# EAGLE board resourciboard - routed (EAGLE 9.6.2)
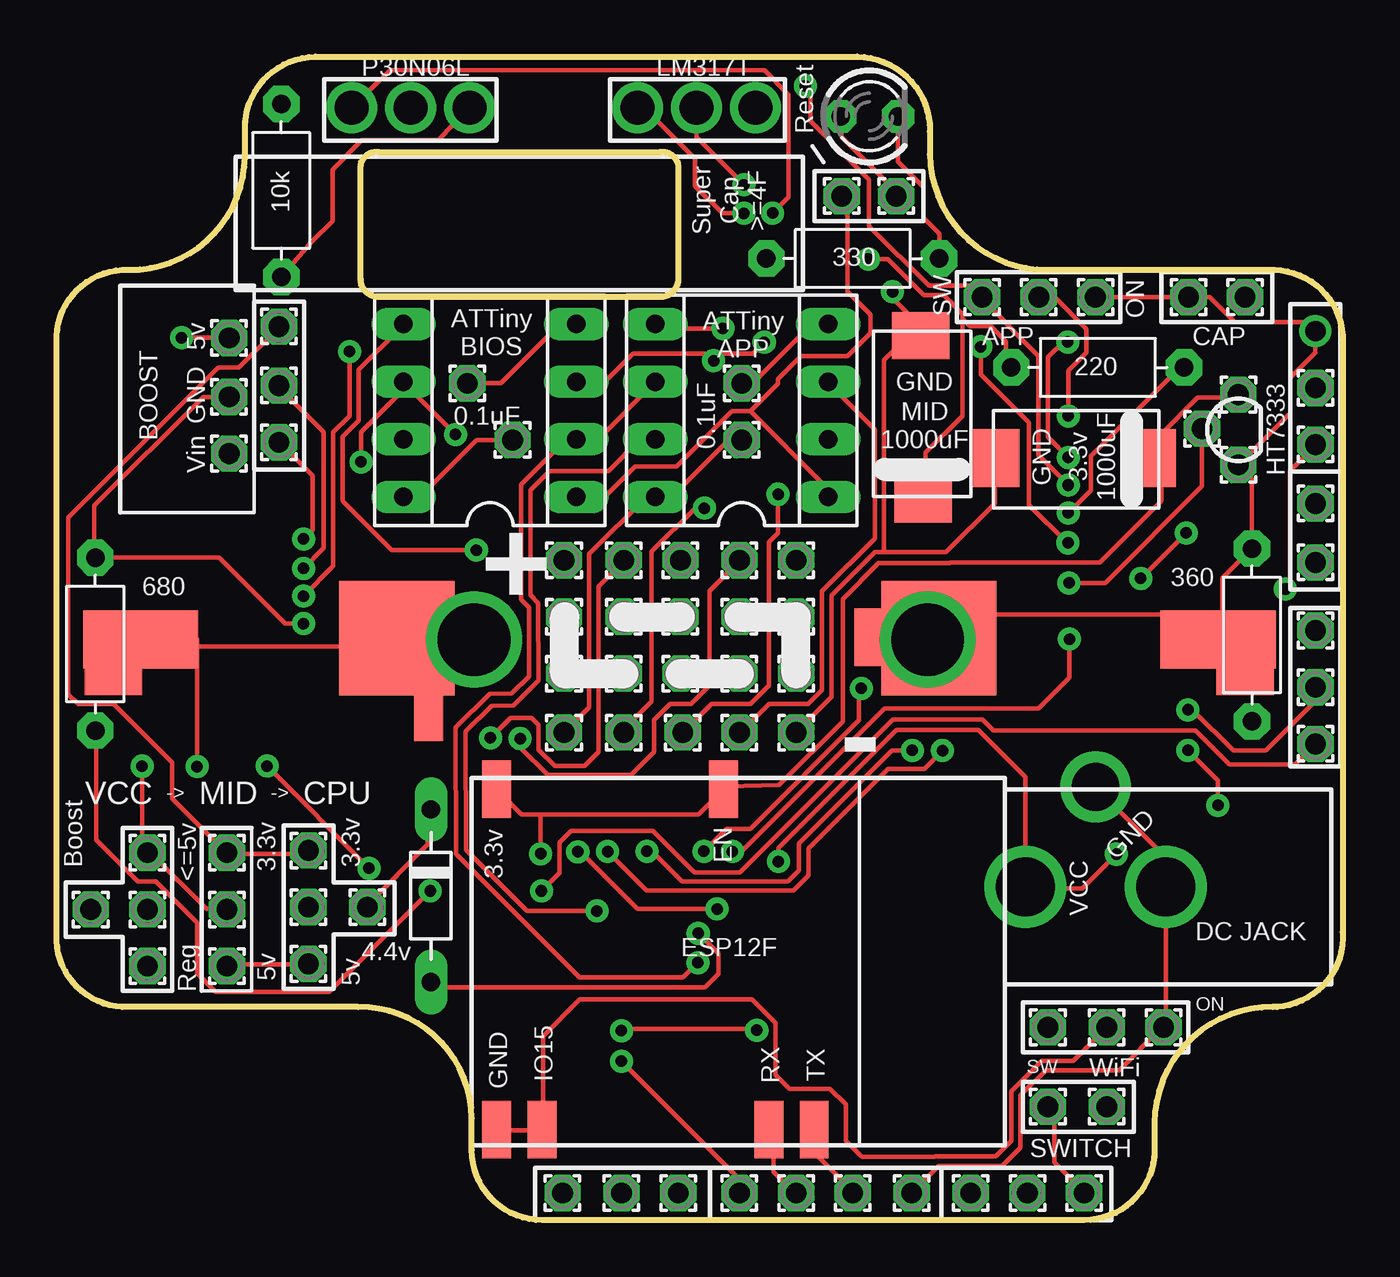
[diagram p0: board, top side]
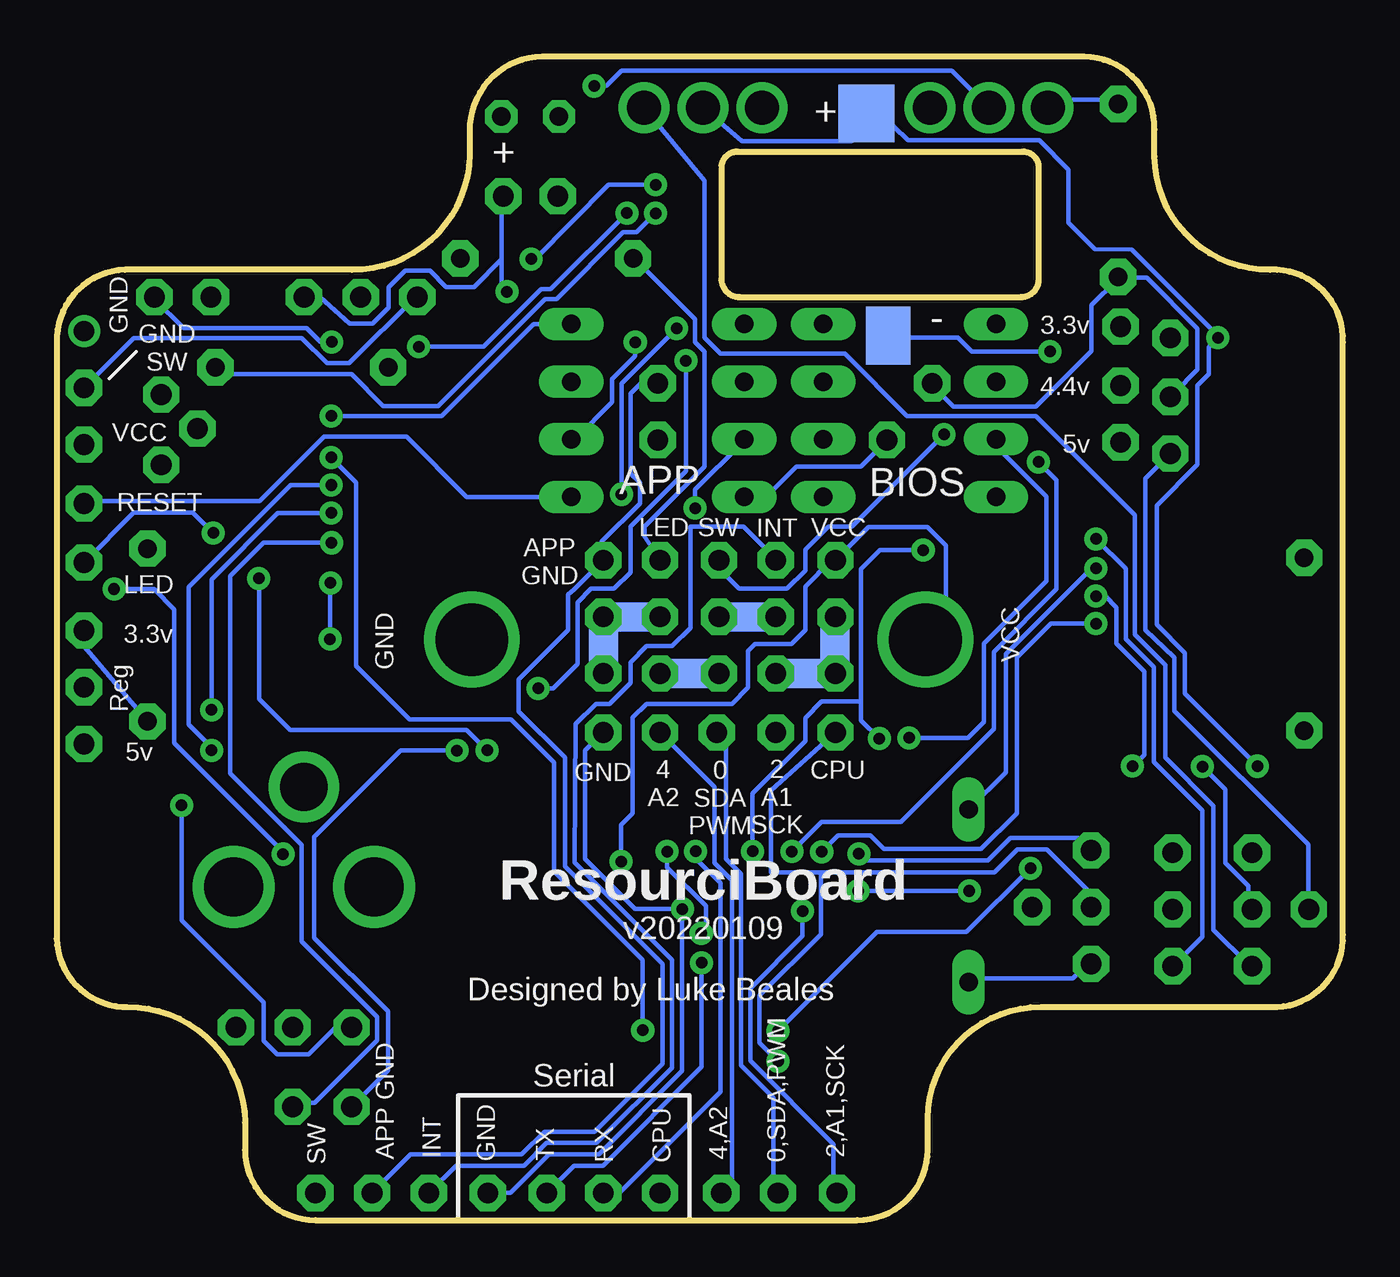
[diagram p1: board, bottom side, seen from below]

Size 56.71 x 51.3 mm. Coordinates in mm from the lower left corner, seen from the top.
Outline: 0,38.7 arc-90 2.9,41.9 3.2,41.9 arc90 8.3,46.9 8.3,48.1 arc-90 11.4,51.3 35.3,51.3 arc-90 38.5,48 38.5,47 arc90 43.7,41.9 53.7,41.9 arc-90 56.7,38.7 56.7,12.7 arc-90 53.8,9.4 53.6,9.4 arc90 48.4,4.3 48.4,3.1 arc-90 45.3,0 21.4,0 arc-90 18.3,3.1 18.3,4.5 arc90 13.3,9.4 2.9,9.4 arc-90 0,12.6 0,38.7
Outline: 13.4,46.5 arc-90 14.2,47.1 26.6,47.1 arc-90 27.4,46.5 27.4,41.5 arc-90 26.6,40.7 14.2,40.7 arc-90 13.4,41.5 13.4,46.5
Copper layers (1*16): Top 0.035mm / dielectric 1.5mm / Bottom 0.035mm
Design rules "SparkFun": minimum track width 8mil, minimum drill 20mil, track to track 8mil, track to pad 8mil, pad to pad 8mil, via to via 8mil, smd to smd 8mil, copper to edge 10mil, drill to drill 8mil, minimum pad ring 12mil, minimum via ring 10mil, stop-mask expansion 4mil, vias tented up to drill 25mil, thermal gap 10mil
vRestrict: area 17.4,2.6 to 35.9,20.6; area 21.2,20.6 to 33.9,30.3

## Footprints (pad centres in the part's own frame; a part is rotated, then mirrored left to right if it is on the bottom)
1,6/0,9 = drill 0.914 pad 1.6 octagon: 1 0,0
LED3MM = drill 0.813 octagon: A -1.27,0; K 1.27,0
SOCKET-08 = drill 0.813 long: 1 -3.81,-3.81; 2 -1.27,-3.81; 3 1.27,-3.81; 4 3.81,-3.81; 5 3.81,3.81; 6 1.27,3.81; 7 -1.27,3.81; 8 -3.81,3.81
R-7,5 = drill 0.813 pad 1.6 octagon: 1 -3.81,0; 2 3.81,0
SMD1,27-2,54 = smd 1.27 x 2.54: 1 0,0
SMD2,54-5,08 = smd 2.54 x 5.08: 1 0,0
D-7.5 = drill 0.813 long: A 3.81,0; C -3.81,0

## Placement (x,y rotation side)
3.3V  [1,6/0,9]  11.1,16.3 0 top  (not fitted)
5V  [1,6/0,9]  7.5,11.2 180 top  (not fitted)
E$1  [LED3MM]  35.83,48.67 0 top
E$2  [SOCKET-08]  30.2,35.7 90 top
E$3  [1,6/0,9]  55.5,26 0 top  (not fitted)
E$4  [R-7,5]  9.9,45.4 90 top
E$5  [SMD1,27-2,54]  38.1,39.4 270 top
E$6  [R-7,5]  35.1,42.4 0 top
E$7  [R-7,5]  45.9,37.6 0 top
E$8  [SOCKET-08]  19.1,35.7 90 top
E$9  [1,6/0,9]  20.1,34.4 180 top  (not fitted)
E$10  [R-7,5]  1.7,25.4 90 top
E$11  [1,6/0,9]  30.1,29.1 90 top  (not fitted)
E$12  [1,6/0,9]  27.5,29.1 90 top  (not fitted)
E$13  [SMD1,27-2,54]  20.4,48.8 180 bottom
E$14  [SMD1,27-2,54]  33.4,4 180 top
E$15  [SMD1,27-2,54]  29.4,19 180 top
E$16  [R-7,5]  52.7,25.8 90 top
E$17  [SMD1,27-2,54]  19.4,19 180 top
E$18  [1,6/0,9]  27.4,1.2 90 top  (not fitted)
E$19  [SMD1,27-2,54]  41,33.6 0 top
E$20  [SMD1,27-2,54]  31.4,4 180 top
E$21  [1,6/0,9]  25,29.1 90 top  (not fitted)
E$22  [SMD2,54-5,08]  3.7,25.6 90 top
E$23  [1,6/0,9]  18.1,36.9 180 top  (not fitted)
E$24  [1,6/0,9]  55.5,34.2 180 top  (not fitted)
E$25  [SMD2,54-5,08]  51.2,25.6 90 top
E$26  [SMD2,54-5,08]  38.9,26.9 90 top
E$27  VCC  [SMD2,54-5,08]  15,26.9 90 top
E$28  [1,6/0,9]  22.3,1.2 90 top  (not fitted)
E$29  [1,6/0,9]  24.9,1.2 90 top  (not fitted)
E$30  [1,6/0,9]  55.5,31.6 180 top  (not fitted)
E$31  [1,6/0,9]  45.3,1.2 90 top  (not fitted)
E$32  [1,6/0,9]  40.3,1.2 90 top  (not fitted)
E$33  [1,6/0,9]  55.5,29 180 top  (not fitted)
E$34  [1,6/0,9]  49.9,40.7 270 top  (not fitted)
E$35  [1,6/0,9]  52.4,40.7 270 top  (not fitted)
E$36  [1,6/0,9]  11.1,11.3 0 top  (not fitted)
E$37  [1,6/0,9]  30.1,1.2 0 top  (not fitted)
E$38  [SMD1,27-2,54]  20.4,39 180 bottom
E$39  [SMD2,54-5,08]  38.9,24.4 90 top
E$40  VCC  [SMD2,54-5,08]  15,24.4 90 top
E$41  [1,6/0,9]  43.3,40.7 90 top  (not fitted)
E$42  [1,6/0,9]  40.8,40.7 90 top  (not fitted)
E$43  [1,6/0,9]  45.8,40.7 90 top  (not fitted)
E$44  [SMD1,27-2,54]  19.4,4 180 top
E$45  [1,6/0,9]  11.1,13.8 0 top  (not fitted)
E$46  [D-7.5]  16.5,14.3 270 top
E$47  [1,6/0,9]  13.7,13.8 90 top  (not fitted)
E$48  [1,6/0,9]  4,16.2 180 top  (not fitted)
E$49  [1,6/0,9]  4,13.7 180 top  (not fitted)
E$50  [1,6/0,9]  43.7,8.5 270 top  (not fitted)
E$51  [1,6/0,9]  46.3,8.5 270 top  (not fitted)
E$52  [1,6/0,9]  52.1,33.3 180 top  (not fitted)
E$53  [1,6/0,9]  50.5,34.9 180 top  (not fitted)
E$54  [1,6/0,9]  52.1,36.4 180 top  (not fitted)
E$55  [1,6/0,9]  43.7,5 90 top  (not fitted)
E$56  [1,6/0,9]  46.3,5 90 top  (not fitted)
E$57  [1,6/0,9]  4,11.2 180 top  (not fitted)
E$58  [1,6/0,9]  1.5,13.7 270 top  (not fitted)
E$59  [1,6/0,9]  34.62,45.15 90 top  (not fitted)
E$60  [1,6/0,9]  7.5,16.2 180 top  (not fitted)
E$61  [1,6/0,9]  37.02,45.15 90 top  (not fitted)
E$62  [1,6/0,9]  30.2,34.4 180 top  (not fitted)
E$63  [1,6/0,9]  30.2,36.9 180 top  (not fitted)
E$64  [SMD1,27-2,54]  22.39,25.41 180 bottom
E$65  [SMD1,27-2,54]  32.6,25.4 180 bottom
E$66  [1,6/0,9]  55.5,36.7 180 top  (not fitted)
E$67  [SMD1,27-2,54]  26.2,26.6 270 bottom
E$68  [SMD1,27-2,54]  28.7,24.1 90 bottom
E$69  [SMD1,27-2,54]  31.3,26.6 90 bottom
E$70  [SMD1,27-2,54]  21.4,4 180 top
E$71  [1,6/0,9]  30.1,26.6 90 top  (not fitted)
E$72  [1,6/0,9]  22.37,29.1 90 top  (not fitted)
E$73  [SMD1,27-2,54]  41.8,33.6 0 top
E$74  [1,6/0,9]  27.5,24.1 90 top  (not fitted)
E$75  [1,6/0,9]  9.8,36.8 0 top  (not fitted)
E$76  [1,6/0,9]  27.5,26.6 90 top  (not fitted)
E$77  [1,6/0,9]  37.7,1.2 90 top  (not fitted)
E$78  [1,6/0,9]  35.1,1.2 90 top  (not fitted)
E$79  [1,6/0,9]  32.6,1.2 90 top  (not fitted)
E$80  [1,6/0,9]  25,24.1 90 top  (not fitted)
E$81  [1,6/0,9]  7.6,36.3 180 top  (not fitted)
E$82  [1,6/0,9]  7.6,38.9 180 top  (not fitted)
E$83  [1,6/0,9]  7.6,33.8 180 top  (not fitted)
E$84  [1,6/0,9]  55.5,23.5 0 top  (not fitted)
E$85  [1,6/0,9]  22.37,21.5 180 top  (not fitted)
E$86  [1,6/0,9]  55.5,21 0 top  (not fitted)
E$87  [1,6/0,9]  25,26.6 90 top  (not fitted)
E$88  [1,6/0,9]  9.8,34.3 0 top  (not fitted)
E$89  [1,6/0,9]  22.37,26.6 90 top  (not fitted)
E$90  [1,6/0,9]  22.37,24.1 90 top  (not fitted)
E$91  [1,6/0,9]  32.6,24.1 90 top  (not fitted)
E$92  [1,6/0,9]  32.6,21.5 90 top  (not fitted)
E$93  [1,6/0,9]  32.6,26.6 90 top  (not fitted)
E$94  [1,6/0,9]  30.1,24.1 90 top  (not fitted)
E$95  [SMD1,27-2,54]  38.1,38.6 270 top
E$96  [1,6/0,9]  42.8,1.2 270 top  (not fitted)
E$97  [SMD1,27-2,54]  23.8,24.1 270 bottom
E$98  [1,6/0,9]  48.8,8.5 270 top  (not fitted)
E$99  [1,6/0,9]  9.8,39.4 0 top  (not fitted)
E$100  [SMD1,27-2,54]  21.6,48.8 180 bottom
E$101  [SMD1,27-2,54]  19.7,39 180 bottom
E$102  [SMD1,27-2,54]  52.4,23.8 90 top
E$103  [1,6/0,9]  27.6,21.5 90 top  (not fitted)
E$104  [1,6/0,9]  25,21.5 90 top  (not fitted)
E$105  [1,6/0,9]  30.1,21.5 90 top  (not fitted)
E$107  [1,6/0,9]  32.6,29.1 0 top  (not fitted)
E$108  [SMD1,27-2,54]  35.8,25.7 0 top
E$109  [SMD1,27-2,54]  16.4,22.4 0 top
POWERONE  [1,6/0,9]  7.5,13.7 180 top  (not fitted)
VCC  [SMD1,27-2,54]  48.7,33.6 0 top
VCC1  [SMD1,27-2,54]  38.2,31.4 270 top
VCC2  [SMD1,27-2,54]  48,33.6 0 top
VCC3  [SMD1,27-2,54]  38.2,32.3 270 top
VCC4  [SMD1,27-2,54]  2.5,23.8 270 top

## Library data of the parts
3.3V 5V E$3 E$5 E$9 E$11-E$15 E$17-E$45 E$47-E$105 E$107-E$109 POWERONE VCC VCC1-VCC4 = wirepad
E$1 = led
E$2 E$8 = ic-package
E$4 E$6 E$7 E$10 E$16 = discrete
E$46 = diode

## Nets
0: E$2.5 E$29.1 E$103.1
2/A1: E$2.7 E$28.1 E$104.1
3.3V: 3.3V.1 E$15.1 E$17.1 E$54.1 E$60.1 E$99.1 VCC2.1 VCC.1
4.4V: E$46.C E$47.1 E$75.1
4/A2: E$2.3 E$18.1 E$105.1
5V: 5V.1 E$36.1 E$46.A E$53.1 E$88.1
BIOS_LED: E$6.1 E$8.5 E$11.1 E$33.1
BIOS_SW: E$4.2 E$56.1
CAP_GND: E$35.1 E$38.1 E$101.1
CPU: E$2.8 E$8.8 E$9.1 E$37.1 E$45.1 E$62.1 E$85.1
GND: E$1.A E$4.1 E$5.1 E$8.4 E$10.2 E$16.2 E$19.1 E$23.1 E$25.1 E$26.1 E$34.1 E$39.1 E$43.1 E$52.1 E$61.1 E$73.1 E$77.1 E$81.1 E$92.1 E$95.1 E$98.1 E$108.1
GND_APP: E$2.4 E$41.1 E$63.1 E$96.1 E$107.1
GND_WIFI: E$44.1 E$51.1 E$70.1
INT: E$8.7 E$21.1 E$32.1
LED_+: E$1.K E$6.2
MID: E$7.1 E$13.1 E$48.1 E$82.1 E$100.1 POWERONE.1 VCC1.1 VCC3.1
PRE_BIOS_SW: E$8.6 E$12.1 E$31.1 E$55.1
REG_GND: E$7.2 E$84.1
REG_GND_3V: E$3.1 E$16.1
REG_GND_5V: E$10.1 E$86.1
RESET: E$2.1 E$8.1 E$30.1 E$59.1
RX: E$2.2 E$8.3 E$20.1 E$79.1
SW: E$42.1 E$50.1 E$66.1
TX: E$2.6 E$8.2 E$14.1 E$78.1
VCC: E$22.1 E$24.1 E$27.1 E$40.1 E$49.1 E$72.1 E$109.1
VCC_TO_BOOST: E$58.1 E$83.1
VCC_TO_REG: E$57.1

## Tracks (layer width: path | path; a pad name or v marks a point on that pad's centre or on a via)
0  (via drill 0.51)
  Top 0.203: v29.37,39.32 26.52,39.32 E$2.5 | v31.81,32.01 31.81,30.31 31.41,29.91 31.41,23.57 30.6,22.76 28.87,22.76 27.61,21.5 E$103.1
  Bottom 0.203: v29.37,39.32 31.81,36.88 v31.81,32.01 | E$29.1 25.1,1.44 25.1,5.39 26.53,6.82 26.53,15.27 27.2,15.94 27.2,21.1 E$103.1
2/A1  (via drill 0.51)
  Top 0.203: v28.55,31.4 28.15,31.4 26.23,29.47 26.23,22.86 25,21.63 E$104.1 | v23.82,13.63 20.74,13.63 18.04,16.32 18.03,21.55 19.17,22.68 20.15,22.7 21.25,23.8 21.23,27.21 20.89,27.55 20.89,32.2 21.72,33.03 24.32,33.03 25.72,34.43 E$2.7
  Bottom 0.203: v28.55,31.4 28.55,32.21 26.52,34.24 E$2.7 | v23.82,13.63 23.82,12.53 26.12,10.23 26.12,7.02 22.46,3.35 22.46,1.53 E$28.1
3.3V  (via drill 0.51)
  Top 0.203: VCC.1 48.7,31.7 46,29 39.4,29 39.38,28.97 36.23,28.97 34.66,27.4 34.66,21.99 31.85,19.19 29.53,19.13 E$15.1 28.3,17.9 21.34,17.9 | 21.34,17.9 20.5,17.9 E$17.1 | 3.3V.1 11.08,16.16 7.63,16.16 E$60.1 5.1,18.6 5.1,20.18 2.52,22.76 0.94,22.76 0.51,23.19 0.51,30.99 7.12,37.59 8.03,37.59 9.8,39.36 E$99.1 | VCC.1 48.67,33.61 48.67,34.65 50.3,36.27 51.92,36.27 E$54.1 | 21.34,17.9 v21.34,16.16 | VCC2.1 48.07,33.63 48.57,33.63 VCC.1
  Bottom 0.203: 3.3V.1 11.66,16.86 14.65,16.86 15.65,15.85 21.04,15.85 v21.34,16.16
4.4V  (via drill 0.51)
  Top 0.203: E$46.C 16.36,17.98 16.36,16.56 13.72,13.92 E$47.1 | v10.88,28.74 11.78,29.64 11.78,34.75 9.86,36.67 9.86,36.68 E$75.1
  Bottom 0.203: v10.88,28.74 10.98,28.84 14.86,24.95 14.86,19.75 E$46.C
4/A2
  Top 0.203: E$2.3 34.04,36.88 36.07,34.85 36.07,30.06 33.75,27.74 33.75,23.38 33.13,22.76 31.41,22.76 30.19,21.55 E$105.1
  Bottom 0.203: E$18.1 26.94,1.66 26.94,14.99 27.7,15.75 27.7,19.1 E$105.1
5V  (via drill 0.51)
  Top 0.203: 5V.1 7.63,11.28 11.08,11.28 E$36.1 | E$53.1 50.5,32.36 46.24,28.1 v44.64,28.1 | v29.79,16.26 30.19,16.26 36.49,22.56 43.29,22.56 44.66,23.92 v44.66,25.62 | v28.29,12.65 29.18,11.76 29.18,10.86 28.59,10.27 16.72,10.27 E$46.A | v10.88,30.04 11.28,30.44 11.28,32.82 E$88.1
  Bottom 0.203: E$46.A 16.36,10.67 11.89,10.67 11.28,11.28 E$36.1 | 5V.1 6.2,12.5 6.2,18.07 8.33,20.2 8.33,24.39 9.57,25.63 9.57,28.73 v10.88,30.04 | v44.64,28.1 44.66,28.08 v44.66,25.62 | v28.29,12.65 28.09,12.85 28.09,13.85 29.79,15.56 v29.79,16.26
BIOS_LED  (via drill 0.51)
  Top 0.203: v18.5,29.54 v18.49,29.55 14.76,29.55 12.61,31.71 12.61,34.55 13.31,35.26 13.31,37.49 15.14,39.32 E$8.5 | v20.44,21.24 20.44,20.84 21.66,19.62 25.31,19.62 26.33,20.64 26.33,22.05 27.05,22.77 27.96,22.77 28.77,23.58 28.77,27.75 30.09,29.06 E$11.1 | v37.72,20.72 36.82,20.72 32.72,16.62 32.72,15.42 32.24,14.94 27.57,14.94 26.25,16.26 v26.02,16.26 | v49.8,30.3 v47.8,28.3
  Bottom 0.203: v18.5,29.54 20.4,29.54 21.24,28.7 21.24,22.86 | v20.44,21.24 21.24,22.04 21.24,22.86 | E$6.1 31.2,42.37 28.55,39.73 28.55,38.71 28.15,38.3 28.15,33.23 30.79,30.58 30.79,30.14 E$11.1 | v26.02,16.26 26.02,18.81 23.69,21.14 23.69,22.15 22.98,22.86 21.24,22.86 | E$33.1 53.3,31.2 50.7,31.2 v49.8,30.3 | v47.8,28.3 47.77,28.27 47.77,22.98 46.4,21.62 38.62,21.62 v37.72,20.72
BIOS_SW  (via drill 0.51, 1.5)
  Top 0.203: v44.59,29.87 44.54,29.87 42.87,31.53 42.87,35.16 40.75,37.29 v40.75,38.51 | v31.56,44.41 32.26,45.11 32.26,49.63 31.2,50.7 14.7,50.7 v13,49.05
  Bottom 0.203: v13,49.05 12.63,49.05 12.39,49.27 12.26,49.4 9.97,49.4 E$4.2 | v44.59,29.87 47.59,29.87 49.06,28.39 49.06,19.7 45.91,16.55 45.91,12.3 42.58,8.97 42.58,7.93 45.33,5.18 46.13,5.18 E$56.1 | v40.75,38.51 37.88,38.51 35.35,41.04 34.93,41.04 v31.56,44.41
CAP_GND  (via drill 0.51)
  Top 0.203: v12.91,38.3 12.91,35.46 12.19,34.74 12.19,28.83 v10.88,27.52 | v24.9,8.35 24.97,8.43 30.82,8.43 v30.87,8.38 | v44.57,38.72 44.37,38.72 43.7,38.05 43.7,34.53 v44.6,33.63 | v13.77,15.52 v9.27,20.02
  Bottom 0.203: 19.81,38.91 16.97,38.91 16.36,38.3 v12.91,38.3 | 19.81,38.91 20.32,38.91 E$38.1 | v10.88,27.52 10.48,27.52 9.98,27.02 9.98,25.42 8.76,24.2 8.76,20.51 9.25,20.02 v9.27,20.02 | v24.9,8.35 20.55,12.7 16.59,12.7 v13.77,15.52 | v30.87,8.38 30.87,11.48 34.77,15.38 34.77,20.18 36.67,22.08 41.15,22.08 43.5,24.43 43.5,32.53 v44.6,33.63 | v44.57,38.72 45.07,38.72 45.67,39.32 51.11,39.32 52.4,40.61 E$35.1 | 19.81,38.91 E$101.1
CPU  (via drill 0.51)
  Top 0.203: E$9.1 18.51,34.4 16,31.89 E$8.8 | E$62.1 29.61,34.4 27.1,31.89 E$2.8 26,31.89 23.48,29.37 23.48,22.61 E$85.1 | v24.9,7.01 29.98,1.93 29.98,1.32 E$37.1
  Bottom 0.203: E$2.8 26.32,32.01 25.3,32.01 24.08,33.23 21.24,33.23 20.22,34.24 E$9.1 | 23,15.33 25.2,15.33 25.2,18.94 E$85.1 | 23,15.33 15.37,15.33 14.36,16.34 13.04,16.34 11.1,14.4 E$45.1 | 23,15.33 23,12.61 25.71,9.91 25.71,7.83 v24.9,7.01
GND  (via drill 0.51, 0.9, 1.5, 2.1, 2.6, 3.2 pad 4.2)
  Top 0.203: E$8.4 22.2,39.51 19.59,36.9 E$23.1 | E$25.1 51.1,25.7 | 51.1,25.7 50.1,26.7 41.2,26.7 E$39.1 38.71,24.49 38.71,25.3 38.51,25.5 v38.4,25.6 38.51,25.71 38.51,26.52 38.71,26.72 E$26.1 38.31,25.71 35.87,25.71 E$108.1 | v18.2,49.05 16.81,47.61 13.44,47.61 12.16,46.31 12.16,44.06 11.26,43.16 E$4.1 | E$81.1 6.45,36.3 1.66,31.51 1.66,29.25 E$10.2 7.17,29.21 10.08,26.3 v10.88,26.3 | 36.48,29.46 36.07,29.46 34.16,27.54 34.16,23.07 32.6,21.51 E$92.1 | 36.48,29.46 39.21,29.46 41.36,31.6 41.36,32.21 E$19.1 41.15,33.63 41.76,33.63 E$73.1 | E$5.1 37.96,39.4 36.48,37.91 36.48,29.46 | E$77.1 38.9,2.4 41.7,2.4 42.5,3.2 42.5,5.51 43.6,6.62 46.85,6.62 48.68,8.45 E$98.1 48.9,8.6 v48.9,14.7 48.9,16 v45.8,19.1 | v22.97,16.24 23.09,16.24 25.61,13.72 v29.12,13.72 | E$43.1 E$34.1 50.84,40.7 51.94,39.59 55.11,39.59 v55.5,39.2 55.5,38.26 54.4,37.16 54.4,35.59 E$52.1 52.7,32.7 E$16.2 51.4,28.31 51.4,26 51.1,25.7 | E$1.A 34.59,48.67 34.59,47.78 37.01,45.35 E$61.1 | E$5.1 36.85,40.65 v36.85,40.94 | E$95.1 38.11,38.71 38.11,39.32 E$5.1
  Bottom 0.203: E$81.1 7.42,36.48 6.41,37.49 6.41,39.32 8.64,41.56 9.86,41.56 E$4.1 9.96,41.46 11.08,40.34 11.08,38.31 13.53,35.87 17.16,35.87 18.1,36.8 E$23.1 | E$92.1 33.4,20.7 33.4,15.92 31.2,13.72 v29.12,13.72 | E$77.1 36.7,1.2 35,2.9 32.8,2.9 29.12,6.58 v29.12,13.72 | v10.88,26.3 12.88,26.3 14.38,24.8 14.38,17.94 15.96,16.36 20.22,16.36 20.83,16.97 22.25,16.97 v22.97,16.24 | v29.12,13.72 | E$43.1 45.1,40.7 43.8,39.52 42.78,39.52 42.07,40.23 42.07,41.15 41.35,41.86 40.24,41.86 39.53,41.15 38.31,41.15 37.1,42.37 | E$61.1 37.1,45.07 37.1,42.37 | v36.85,40.94 37.1,41.18 37.1,42.37
GND_APP  (via drill 0.51)
  Top 0.203: E$2.4 33.3,39.51 30.69,36.9 E$63.1 | E$41.1 44,40.7 45.4,39.3 45.4,38.26 44.6,37.46 v44.6,35.46
  Bottom 0.203: v44.6,35.46 39.73,35.46 35.68,39.51 E$2.4 | E$96.1 41.1,2.9 36.2,2.9 35.2,3.9 33,3.9 30,6.9 30,11.3 34.3,15.6 34.3,20.4 36.34,22.44 36.34,23.84 34.16,26.02 34.16,27.58 33.9,27.8 E$107.1 32.6,29.58 32.67,29.92 30.99,31.6 30.99,32.51 31.4,32.92 31.4,36.45 30.95,36.9 E$63.1
GND_WIFI
  Top 0.203: E$44.1 19.41,3.96 21.24,3.96 E$70.1 21.44,4.17 21.44,8.12 23.06,9.73 30.66,9.73 31.7,8.69 31.7,6.4 32.3,5.8 34.1,5.8 34.8,5.1 34.8,3.5 35.5,2.8 38.73,2.8 38.73,2.81 41.4,2.81 42.09,3.5 42.09,5.68 43.44,7.02 44.82,7.02 E$51.1
INT  (via drill 0.51)
  Top 0.203: v19.13,21.26 20.01,22.15 20.95,22.15 21.25,21.84 21.25,20.74 21.97,20.03 23.28,20.03 23.89,20.64 23.89,27.95 24.97,29.02 E$21.1
  Bottom 0.203: E$8.7 15.29,34.13 13.07,31.91 13.07,28.19 15.83,25.43 15.83,21.96 16.53,21.26 v19.13,21.26 | E$32.1 39.1,2.4 36.1,2.4 35.1,3.4 32.9,3.4 29.57,6.73 29.57,11.47 33.88,15.78 33.83,21.87 32.93,22.77 32.32,22.77 31.41,23.68 31.41,24.59 30.7,25.31 29.58,25.31 28.77,26.12 28.77,30.57 28.76,30.58 26.43,30.58 25,29.15 E$21.1
LED_+
  Top 0.203: E$1.K 37.1,46.66 38.22,45.55 38.22,44.2 38.91,43.5 E$6.2
MID  (via drill 0.51, 1.5)
  Top 0.203: POWERONE.1 7.42,13.72 6.61,13.72 4.17,16.16 E$48.1 3.97,16.36 3.76,16.56 v3.76,20.02 | E$82.1 v5.51,38.91 | v35.78,42.38 36.64,42.38 38.25,40.78 39.11,40.78 39.93,39.96 39.93,39.73 | 39.93,39.73 39.93,35.46 38.31,33.83 38.31,32.41 | 38.31,32.41 38.31,31.51 VCC1.1 | 39.93,39.73 39.96,39.73 40.27,39.42 41.18,39.42 41.86,38.74 41.86,37.83 E$7.1 | v30.3,45.65 28.2,47.75 v28.2,49.05 | 38.31,32.41 VCC3.1
  Bottom 0.203: v3.76,20.02 6.96,23.22 6.96,25.02 8.21,26.26 8.21,31.5 6.41,33.3 6.41,36.8 5.91,37.3 5.91,38.5 v5.51,38.91 5.51,39 9.3,42.79 10.92,42.81 12.1,43.98 12.1,46.33 13.39,47.61 19.18,47.62 E$13.1 21,48.22 | 21,48.22 21.67,47.58 26.48,47.58 v28.2,49.05 | v35.78,42.38 35.61,42.38 32.37,45.65 v30.3,45.65 | E$100.1 21.44,48.67 21.04,48.26 21,48.22
PRE_BIOS_SW  (via drill 0.51)
  Top 0.203: E$55.1 44,4.97 44,2.54 45.22,1.32 E$31.1 | v17.58,34.65 15.35,36.88 E$8.6 15.14,36.88 15.14,36.48 13.42,34.75 v13.42,33.43 | v39.05,20.7 38.25,19.9 36.65,19.9 33.15,16.4 33.15,15.2 32.48,14.53 26.02,14.53 v24.29,16.26
  Bottom 0.203: v17.58,34.65 v17.59,34.65 21.65,30.58 22.68,30.58 23.69,29.57 23.69,28.65 24.5,27.84 26.63,27.84 27.38,28.6 E$12.1 | v39.05,20.7 41.55,20.7 45.35,16.9 45.35,12.45 42.1,9.2 42.1,6.6 E$55.1 | v24.29,16.26 22.99,17.56 19.49,17.56 15.39,21.66 15.39,25.06 12.62,27.83 12.62,32.63 v13.42,33.43
REG_GND  (via drill 0.51, 1.5)
  Top 0.203: v25.6,49.05 25.9,49.05 28.15,46.79 28.15,45.59 29.35,44.39 v30.3,44.39 | E$7.2 49.51,37.6 45.6,33.69 45.6,32.18 v44.6,31.18 | v49.88,22.5 50.08,22.5 51.88,20.7 53.3,20.7 55.5,22.9 E$84.1
  Bottom 0.203: v30.3,44.39 31.14,43.55 31.74,43.55 34.68,40.61 35.18,40.61 39.9,35.9 42.31,35.9 43.71,37.3 49.41,37.3 E$7.2 | v44.6,31.18 v44.61,31.17 46.96,31.17 49.88,28.25 v49.88,22.5
REG_GND_3V
  Bottom 0.203: E$16.1 55.5,25.28 E$3.1
REG_GND_5V  (via drill 0.51)
  Top 0.203: v16.47,14.52 12.01,10.06 7.02,10.06 6.2,10.87 6.2,13.11 4.37,14.94 3.56,14.94 1.73,16.77 1.73,21.44 E$10.1 | v21.37,14.52 22.16,15.31 22.16,16.65 22.68,17.17 26.3,17.17 28.13,15.34 30.12,15.34 36.87,22.08 40.82,22.08 41.3,21.6 50.2,21.6 51.7,20.1 54.6,20.1 E$86.1
  Bottom 0.203: v21.37,14.52 v16.47,14.52
RESET
  Top 0.203: 30.59,35.66 29.77,35.66 27.34,33.23 25.51,33.23 24.29,32.01 23.07,32.01 E$8.1 | 30.59,35.66 33.84,32.41 33.84,32.01 E$2.1 | 30.59,35.66 31.8,36.88 31.8,37.08 32.82,38.1 34.85,38.1 35.87,39.12 35.87,39.93 34.85,40.95 34.85,44.28 E$59.1
  Bottom 0.203: E$30.1 55.4,31.7 47.76,31.7 44.91,34.54 41.28,34.54 38.63,31.89 E$2.1
RX  (via drill 0.51)
  Top 0.203: E$20.1 31.6,3.96 31.6,2.13 32.42,1.32 E$79.1 | 28.96,38.2 30.69,38.2 v31.2,38.71 | 28.96,38.2 25.41,38.2 24.29,37.09 23.07,37.09 E$8.3 | v35.48,23.45 35.38,23.35 35.38,22.05 30.59,17.26 29.53,17.26 v28.53,16.26 | 28.96,38.2 v28.96,37.9
  Bottom 0.203: v31.2,38.71 31.2,38.1 32.21,37.09 32.21,36.07 33.84,34.44 E$2.2 | E$79.1 31.89,1.2 27.43,5.66 27.43,14.86 28.53,15.96 v28.53,16.26 | v35.48,23.45 34.82,23.45 33.75,24.51 33.75,27.23 33.14,27.84 32.13,27.84 31.41,28.56 31.41,30.57 28.96,33.02 v28.96,37.9
SW  (via drill 0.51, 1.5)
  Top 0.203: v51.2,18.29 51.2,19.39 v49.87,20.72 | v44.6,32.41 43.29,33.73 43.29,38.1 42.39,39 E$42.1 40.31,41.2 38.45,41.2 35.81,43.84 35.81,45.88 33.24,48.45 33.24,49.78 v33.01,50.01
  Bottom 0.203: E$50.1 44.4,8.5 45.59,7.31 46.99,7.31 47.59,7.91 47.59,9.61 51.2,13.22 v51.2,18.29 | v49.87,20.72 49.87,20.85 50.89,21.86 50.89,27.92 46.4,32.41 v44.6,32.41 | E$42.1 40.89,40.7 43.81,37.78 44.78,37.78 45.9,38.9 53.3,38.9 E$66.1 | v33.01,50.01 32.46,50.01 31.79,50.67 17.22,50.67 v15.6,49.05
TX  (via drill 0.51)
  Top 0.203: E$14.1 33.43,3.96 33.43,2.95 35.06,1.32 E$78.1 | E$2.6 26.32,36.88 23.88,34.44 23.07,34.44 E$8.2 22.48,34.43 20.48,32.42 20.48,27.36 20.82,27.02 20.82,23.98 20.06,23.22 19.08,23.2 17.6,21.71 17.61,16.15 23.06,10.7 27.62,10.7 v28.27,11.35
  Bottom 0.203: E$78.1 33.9,2.4 32.62,2.4 28.27,6.75 v28.27,11.35
VCC  (via drill 0.51, 2.6, 3.2 pad 4.2)
  Top 0.203: E$40.1 14.1,25.3 4,25.3 E$22.1 | v6.19,20 6.19,25.6 3.8,25.6 | 3.8,25.6 E$22.1 | 16.37,25.71 16.36,25.71 15.96,26.11 E$27.1 16.37,25.71 | 16.37,25.71 16.57,25.71 | 16.57,25.71 18.39,25.71 v18.4,25.6 | 16.57,25.71 15.64,24.78 E$40.1 | v31.82,15.81 31.82,16.41 37.02,21.61 40.63,21.61 42.7,19.54 v42.7,14.7 42.76,14.64 45.23,14.64 v46.73,16.14 | E$24.1 55.38,34.04 54.36,33.02 54.36,28.01 v54.18,27.83 | E$109.1 16.36,22.45 16.36,23.06 15.14,24.28 E$40.1 | E$22.1 3.76,25.71 3.8,25.6
  Bottom 0.203: v6.19,20 5.19,19 5.19,15.75 4.17,14.73 4.17,13.72 E$49.1 | v18.4,25.6 18.39,25.71 17.49,26.61 17.49,29.75 18.3,30.56 20.91,30.56 E$72.1 22.58,29.06 23.69,27.95 23.69,26.02 24.3,25.41 25.92,25.41 26.23,25.09 26.23,23.48 26.94,22.77 30.7,22.77 31.31,22.15 31.31,17.94 31.82,17.43 v31.82,15.81 | v54.18,27.83 52.42,27.83 51.52,26.93 51.52,21.03 46.73,16.25 v46.73,16.14
VCC_TO_BOOST
  Bottom 0.203: E$58.1 1.53,13.72 1.53,16.56 7.42,22.45 7.42,24.81 8.7,26.02 8.7,32.7 E$83.1
VCC_TO_REG  (via drill 1.5)
  Bottom 0.203: v30.8,49.05 28.15,45.84 28.15,38.92 27.43,38.2 21.95,38.2 19.21,35.46 13.53,35.46 9.16,31.1 9.16,25.81 7.83,24.48 7.83,20.39 5.7,18.26 5.7,12.81 4.17,11.28 E$57.1

## Text on the board
tPlace: P30N06L | LM317T | Reset | 10k | Super / Cap / >=4F | 330 | SW | ON | 5v | ATTiny / BIOS | ATTiny / APP | APP | CAP | 220 | 0.1uF | GND | BOOST | GND | 0.1uF | MID / 1000uF | Vin | GND | 3.3v / 1000uF | HT7333 | + | 680 | 360 | - | VCC | -> | MID | -> | CPU | Boost | 3.3v | 3.3v | EN | GND | <=5v | 3.3v | VCC | DC JACK | 4.4v | ESP12F | Reg | 5v | 5v | ON | GND | IO15 | RX | TX | SW | WiFi | SWITCH
bPlace: + | + | 3.3v | - | GND | GND / SW | 4.4v | VCC | 5v | BIOS | APP | RESET | VCC | INT | SW | LED | APP / GND | LED | VCC | GND | 3.3v | Reg | 5v | CPU | GND | 2 / A1 / SCK | 0 / SDA / PWM | 4 / A2 | ResourciBoard | v20220109 | Designed by Luke Beales | Serial | 2,A1,SCK | APP GND | 4,A2 | CPU | GND | INT | 0,SDA,PWM | RX | TX | SW